# EAGLE board PiezoPreamp_V4.b#1 (EAGLE 7.5.0)
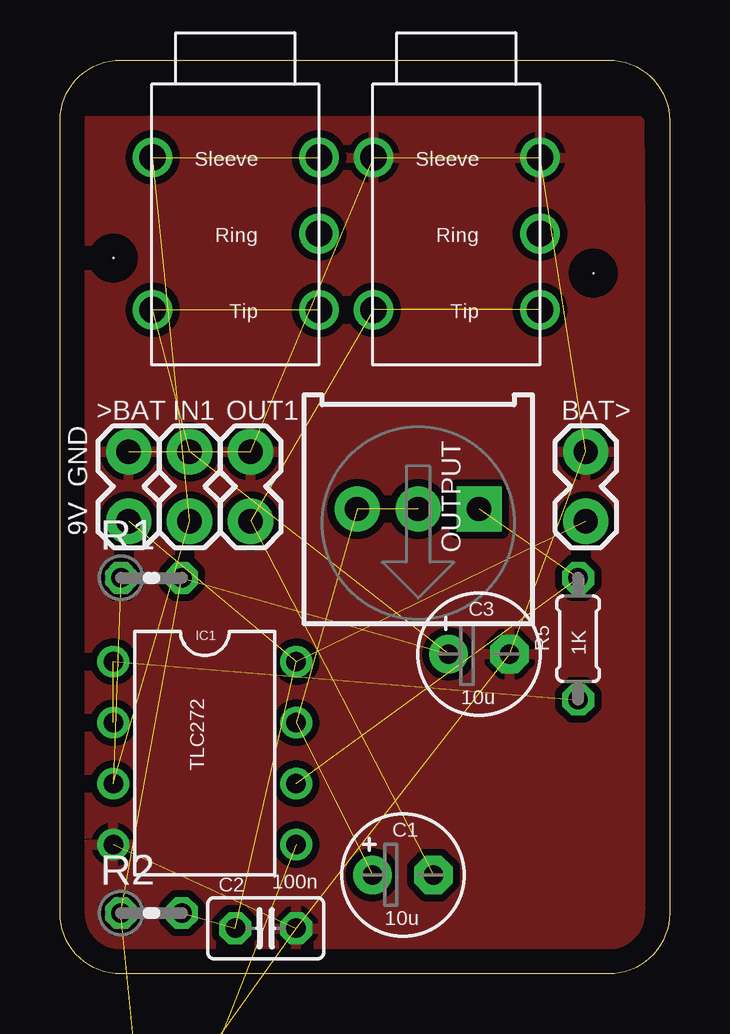
[diagram p0: board, top side]
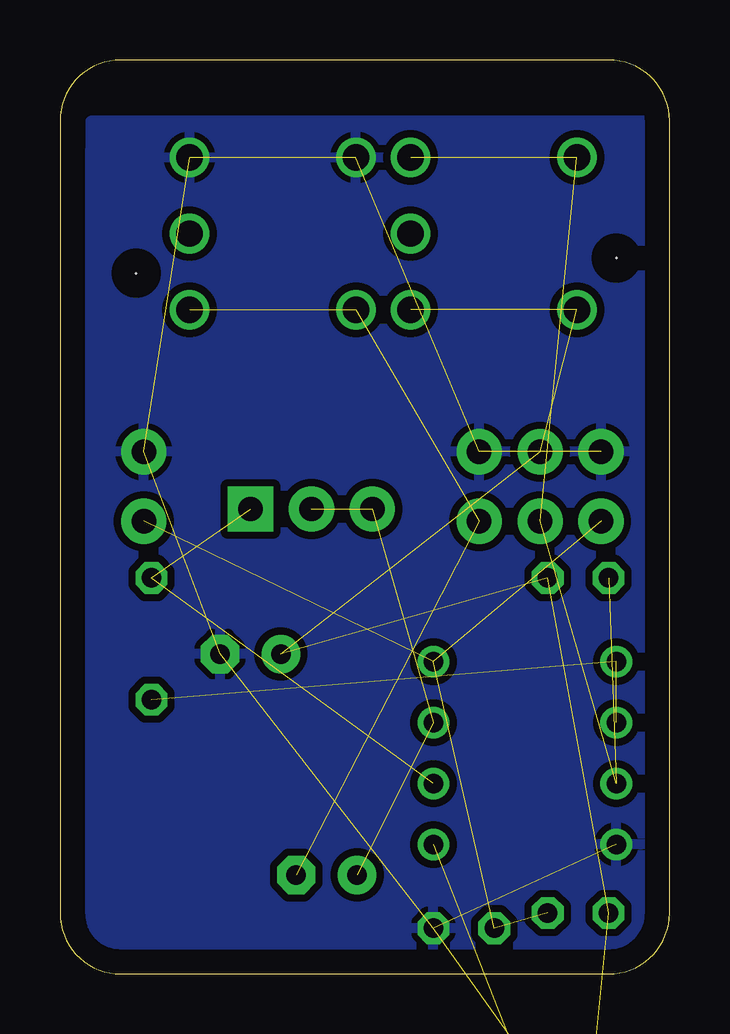
[diagram p1: board, bottom side, seen from below]

Size 25.4 x 38.1 mm. Coordinates in mm from the lower left corner, seen from the top.
Outline: 0,2.54 0,35.56 arc-90 2.54,38.1 22.86,38.1 arc-90 25.4,35.56 25.4,2.54 arc-90 22.86,0 2.54,0 arc-90 0,2.54
Copper layers (1*16): Top 0.035mm / dielectric 1.5mm / Bottom 0.035mm
Design rules "default": minimum track width 10mil, minimum drill 24mil, track to track 8mil, track to pad 8mil, pad to pad 8mil, via to via 8mil, smd to smd 8mil, copper to edge 40mil, drill to drill 8mil, minimum pad ring 10mil, minimum via ring 8mil, stop-mask expansion 4mil, vias tented up to drill 0mil, thermal gap 10mil
Holes 0 mm at 2.22,29.84 22.23,29.21

## Footprints (pad centres in the part's own frame; a part is rotated, then mirrored left to right if it is on the bottom)
1X02_LOCK = drill 1.016 pad 1.88: 1 -0.178,0; 2 2.718,0
E2,5-5 = drill 0.813 pad 1.6: + -1.27,0 | drill 0.813 pad 1.6 octagon: - 1.27,0
C025-025X050 = drill 0.813 octagon: 1 -1.27,0; 2 1.27,0
DIL08 = drill 0.813 pad 1.27: 1 -3.81,-3.81; 2 -1.27,-3.81; 3 1.27,-3.81; 4 3.81,-3.81; 5 3.81,3.81; 6 1.27,3.81; 7 -1.27,3.81; 8 -3.81,3.81
1/8"-F-STEREO-PCB = drill 1.1: RING 5.461,0; SLEEVE1 8.636,6.934; SLEEVE2 8.636,0; TIP1 2.286,6.934; TIP2 2.286,0
0204V = drill 0.813 octagon: 1 -1.27,0; 2 1.27,0
0204/5 = drill 0.813 octagon: 1 -2.54,0; 2 2.54,0
3386U = drill 1.016 pad 1.88 square: 1 -2.54,-0.015 | drill 1.016 pad 1.88: 2 0,-0.015; 3 2.54,-0.015

## Placement (x,y rotation side)
>BAT  [1X02_LOCK]  2.86,19.05 90 top
BAT>  [1X02_LOCK]  21.91,19.05 90 top
C1  10u  [E2,5-5]  14.29,4.13 0 top
C2  100n  [C025-025X050]  8.57,1.91 180 top
C3  10u  [E2,5-5]  17.46,13.34 0 top
IC1  TLC272  [DIL08]  6.03,9.21 270 top
IN1  [1X02_LOCK]  5.4,19.05 90 top
OUT1  [1X02_LOCK]  7.94,19.05 90 top
OUT1-TRS  1/8"-F-STEREO-PCB  [1/8"-F-STEREO-PCB]  20,25.4 90 top
R1  10k..10m  [0204V]  3.81,16.51 0 top
R2  150K  [0204V]  3.81,2.54 0 top
R3  100K  [0204V]  2.54,-10.16 0 top  (outside the outline)
R4  1K  [0204V]  2.54,-16.51 0 top  (outside the outline)
R5  1K  [0204/5]  21.59,13.97 270 top
R6  Gain-pot 10M  [3386U]  14.92,19.37 180 top
U$2  1/8"-F-STEREO-PCB  [1/8"-F-STEREO-PCB]  10.79,25.4 90 top

## Library data of the parts
>BAT BAT> IN1 OUT1 = SparkFun-Connectors
C1-C3 R5 = rcl
IC1 = linear
OUT1-TRS U$2 = CMU-ArtFab
R1-R4 = resistor
R6 = SparkFun-Electromechanical

## Nets
GND: >BAT.2 BAT>.2 C2.1 C3.- IC1.4 OUT1-TRS.SLEEVE1 OUT1-TRS.SLEEVE2 OUT1.2 R3.1
N$1: C3.+ IN1.2 R1.2 R2.1 R3.2 R4.2 U$2.TIP1 U$2.TIP2
N$2: IC1.6 R5.1 R6.1
N$3: C1.- OUT1-TRS.TIP1 OUT1-TRS.TIP2 OUT1.1
N$5: IC1.5 R4.1
N$6: C1.+ IC1.7 R6.2 R6.3
N$8: IC1.3 IN1.1 R1.1 U$2.SLEEVE1 U$2.SLEEVE2
N$14: IC1.1 IC1.2 R5.2
V9V: >BAT.1 BAT>.1 C2.2 IC1.8 R2.2

## Tracks (layer width: path | path; a pad name or v marks a point on that pad's centre or on a via)
GND  (8 unrouted)
  pour Bottom (isolate 0.305): 0.95,35.56 24.13,35.56 24.45,0.95 0.95,0.95
  pour Top (isolate 0.305): 0.95,35.56 24.13,35.56 24.45,0.95 0.95,0.95
N$1  (7 unrouted)
N$2  (2 unrouted)
N$3  (3 unrouted)
N$5  (1 unrouted)
N$6  (3 unrouted)
N$8  (4 unrouted)
N$14  (2 unrouted)
V9V  (4 unrouted)

## Text on the board
tNames: GND | OUTPUT | 9V